# Altium PCB Linefollower_pcb.PcbDoc
Units mm, origin at the board's own origin, x right, y up, seen from the top; angles counter-clockwise.
Board outline 36.2 x 40 mm, 2 copper layers (Top Layer, Bottom Layer), stack 1.671 mm thick; 15 components, 20 nets, 60 pads, 0 vias.
Unrouted connection lines stored in the file: 6.
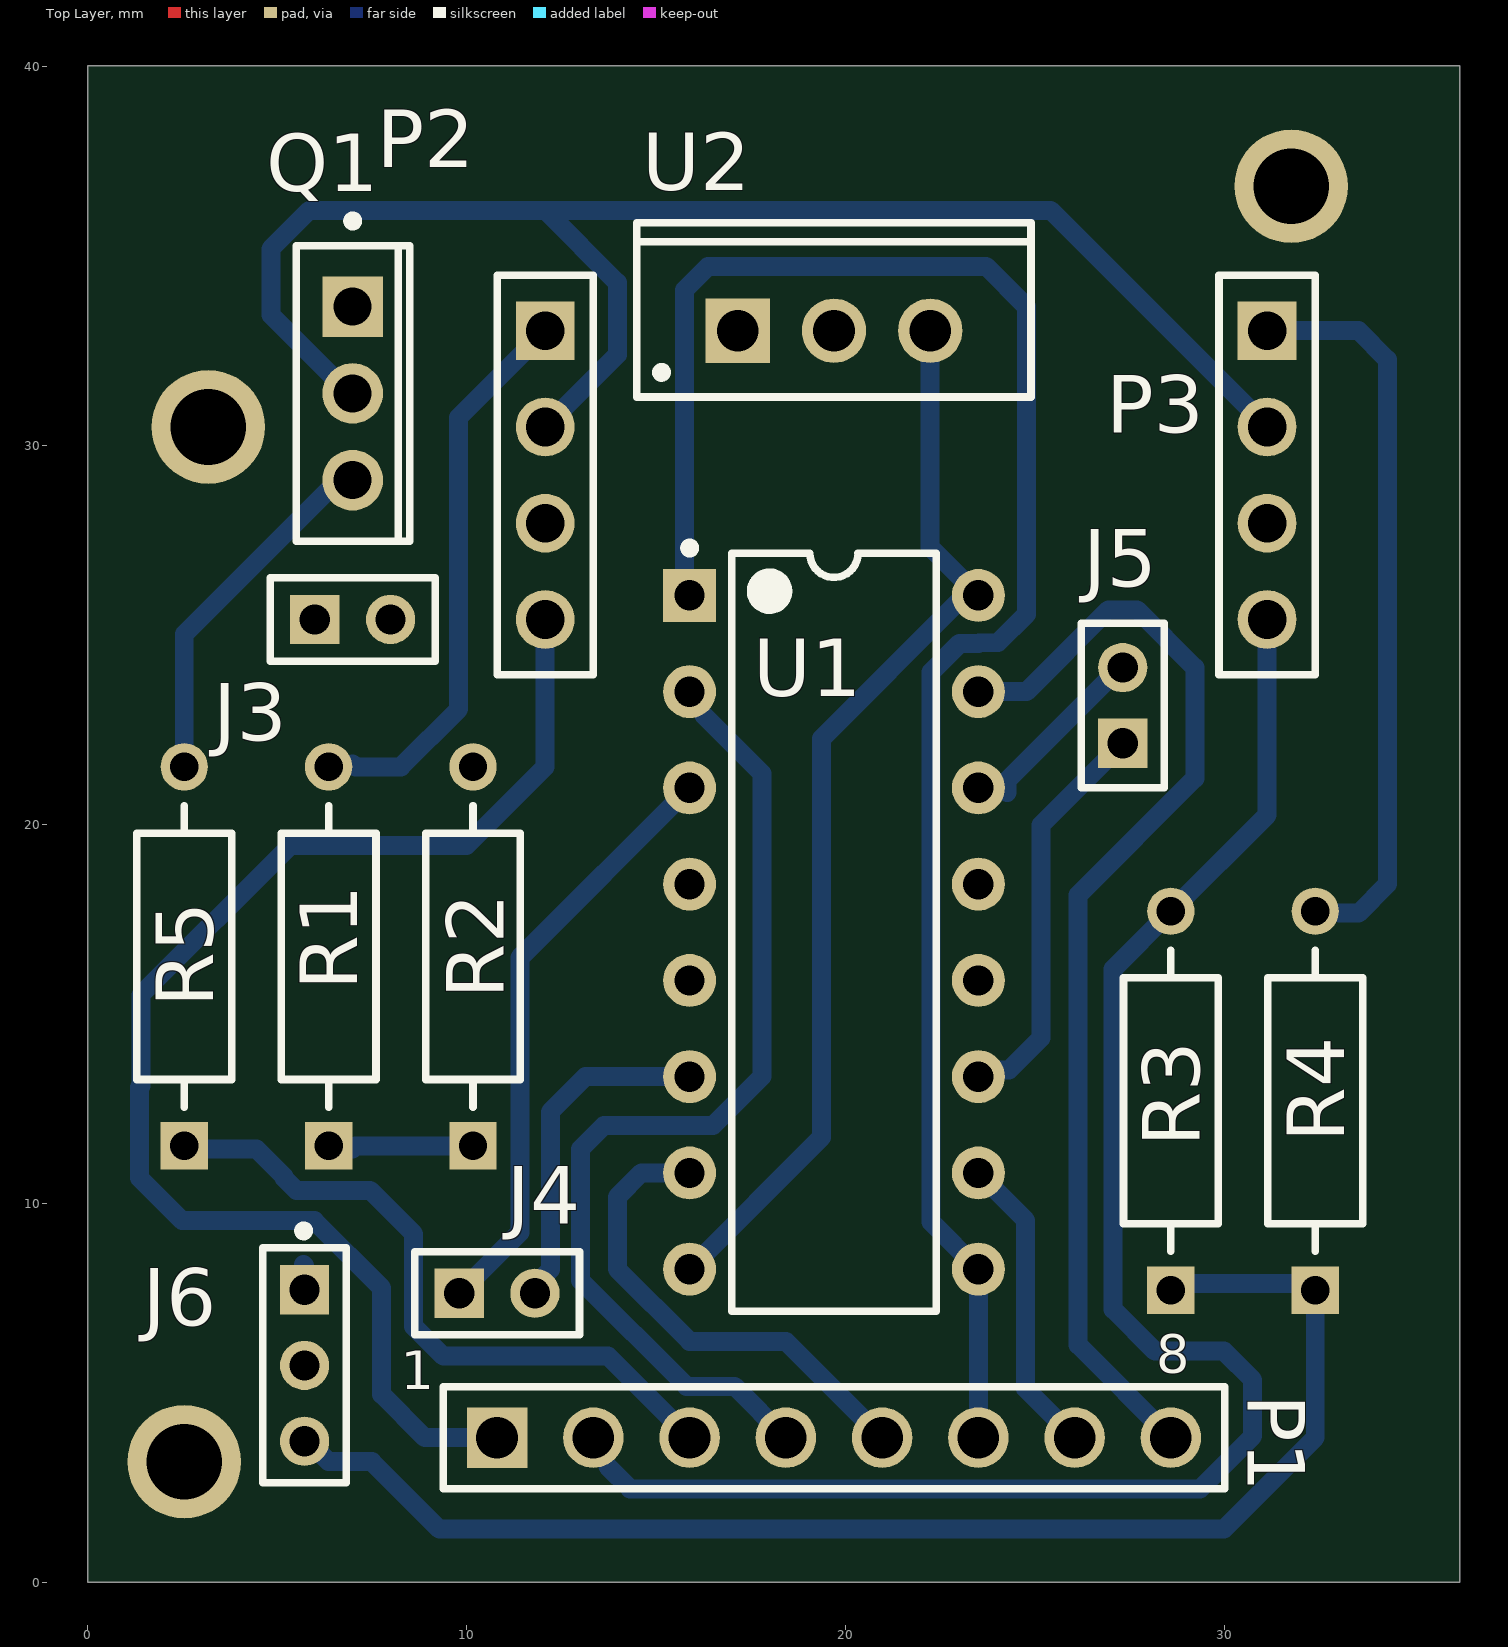
[diagram p0: Top Layer view]
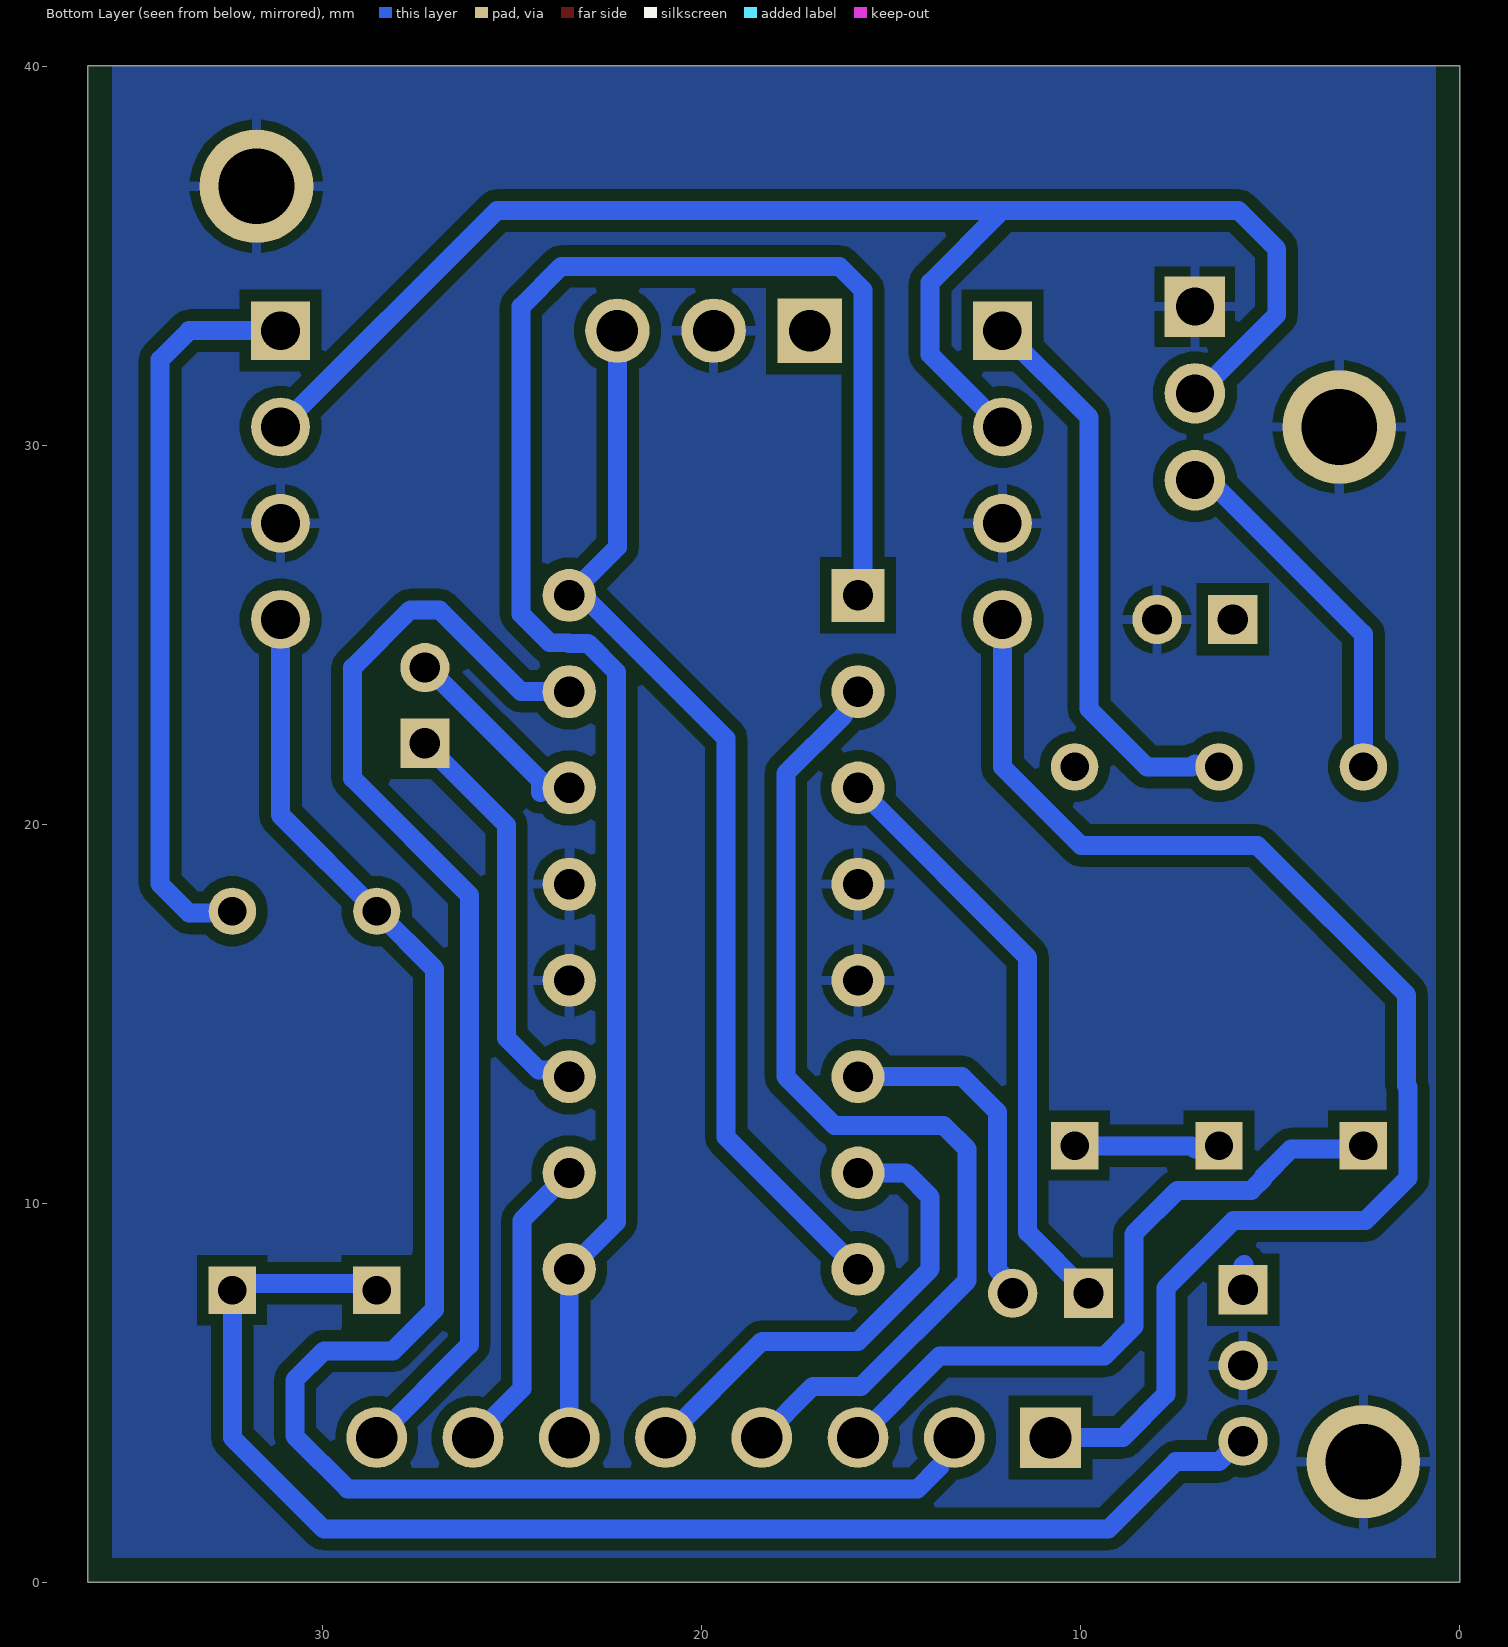
[diagram p1: Bottom Layer view, seen from below]
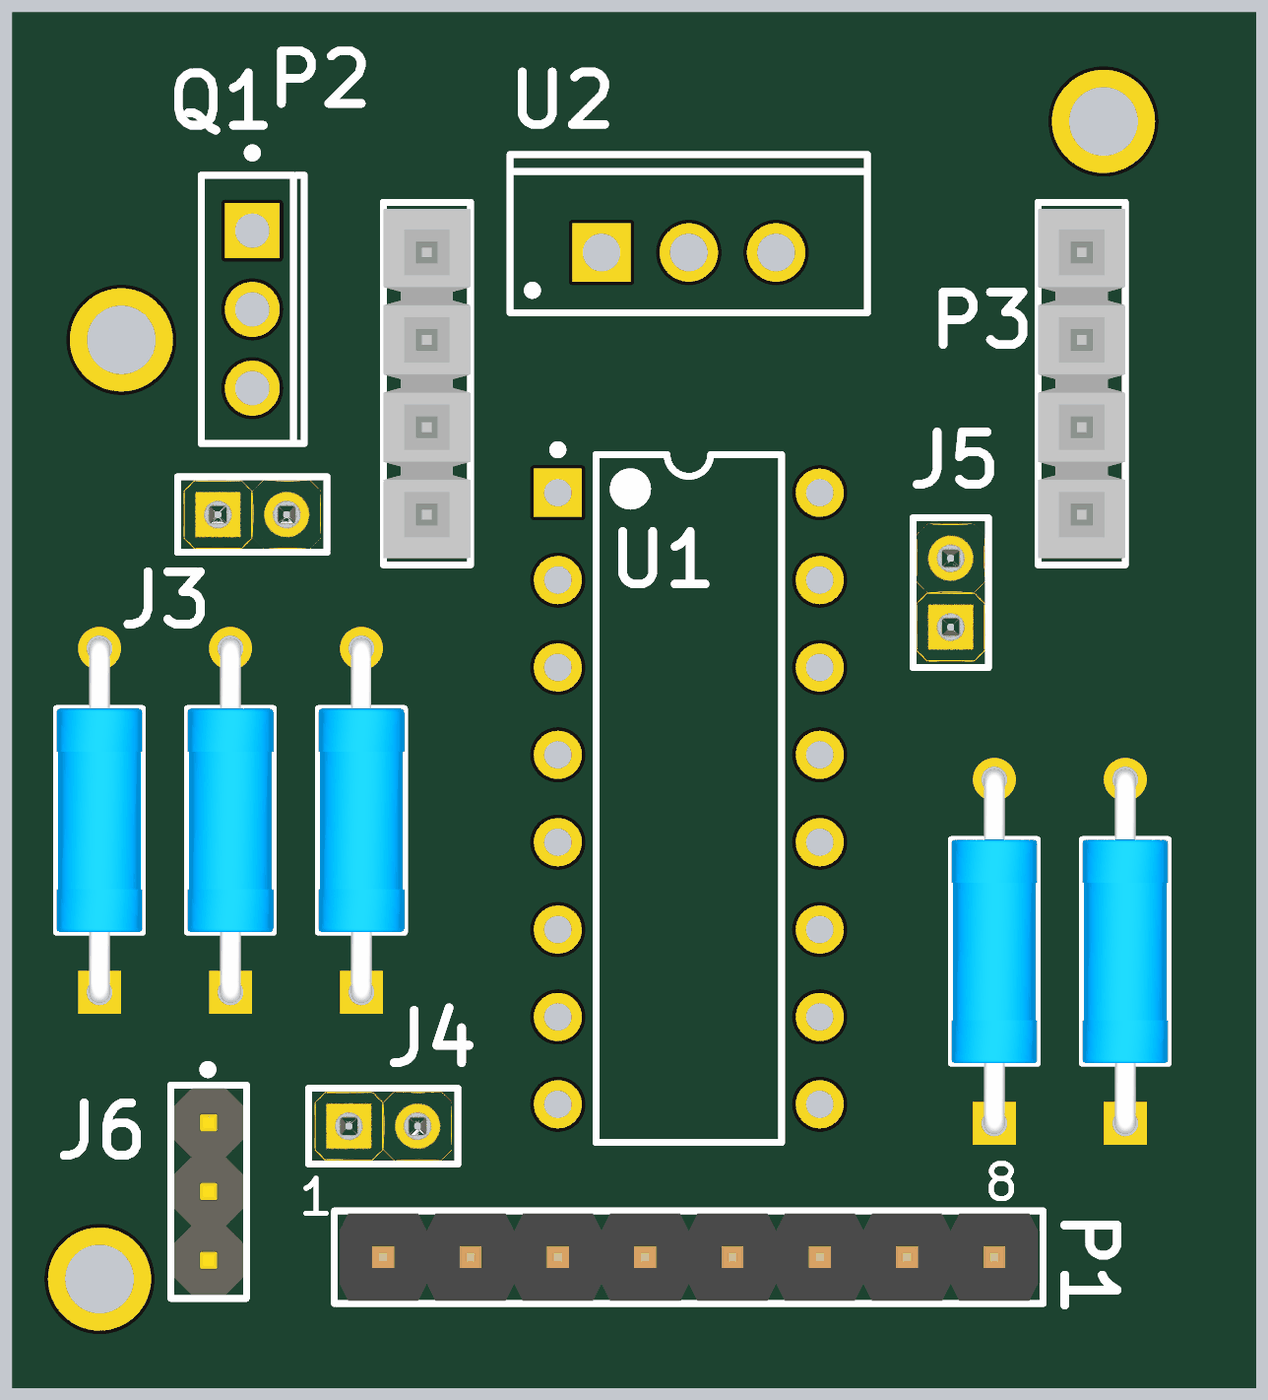
[diagram p2: 3D render of the assembled board from above, using the file's embedded part models]

## Layer stack, top to bottom
Top Solder: solder mask 0.0102, Solder Resist, Dk 3.5
Top Layer: signal copper 0.0356
Dielectric 1: dielectric 1.6, FR-4, Dk 4.8
Bottom Layer: signal copper 0.0356
Bottom Solder: solder mask 0.0102, Solder Resist, Dk 3.5

## Board outline
0,0 36.195,0 36.195,40.005 0,40.005

## Design rules (kind name [scope] priority, off if disabled: settings)
Clearance [All] p1: gap=0.1 ignorepadtopadclearanceinfootprint=TRUE
PolygonConnect [All] p1: connectstyle=Relief reliefconductorwidth=0.254 reliefentries=4 polygonreliefangle="90 Angle" airgapwidth=0.254
RoutingVias [All] p1: holewidth=0.711 width=1.27 viastyle="Through Hole" minholewidth=0.711 minwidth=1.27 maxholewidth=0.711 maxwidth=1.27
SolderMaskExpansion [All] p1: expansion=0.102 istentingtop=FALSE
Width [All] p1: maxlimit=1 minlimit=0.15 preferedwidth=0.5
30 further rules are at their usual default settings.

## Components (designator, comment, footprint, x,y, rotation, side; value= is the part's Value field where it differs from the comment)
J3 "battery supply" FP-M22-2510205-MFG 6.985,25.4 r0 top
J4 "LEFT MOTOR" FP-M22-2510205-MFG 10.795,7.62 r0 top
J5 "RIGHT MOTOR" FP-M22-2510205-MFG 27.305,23.13 r90 top
J6 "SUPPLY" FP-951103-8622-AR-MFG 5.715,5.715 r270 top
P1 "SIGNALS" 61300811121 19.685,3.81 r0 top
P2 "Left sensor" SMTC-TSW-104-08-X-S 12.065,33.02 r270 top
P3 "Right sensor" SMTC-TSW-104-08-X-S 31.115,33.02 r270 top
Q1 "BD135" ONSC-TO-225-3-77-09 6.985,31.365 r0 top
R1 "110R" FP-MRS25-MFG 6.35,16.51 r90 top value=1.1kΩ
R2 "5K1" FP-MRS25-MFG 10.16,16.51 r90 top value=1.1kΩ
R3 "5K1" FP-MRS25-MFG 28.575,12.7 r90 top value=1.1kΩ
R4 "110R" FP-MRS25-MFG 32.385,12.7 r90 top value=1.1kΩ
R5 "1K" FP-MRS25-MFG 2.54,16.51 r90 top value=1.1kΩ
U1 "L293D" STM-L293D-16 19.685,17.145 r0 top
U2 "L7805CV" TO220 19.685,33.02 r0 top

## Footprints (in the part's own frame and the unit in brackets; to place one, negate y for a bottom-side part, rotate by r counter-clockwise, add the part's x,y. Pads: shape width x height; smd on the part's side, far side on the other; paste and mask are expansions set on the pad)
61300811121 [mm] "Pin Header, pitch 2.54 mm, THT, Vertical, single row, 8p"
  rect 1.6x1.6 hole 1.1: 1(-8.89,0)
  round 1.6 hole 1.1: 2(-6.35,0) 3(-3.81,0) 4(-1.27,0) 5(1.27,0) 6(3.81,0) 7(6.35,0) 8(8.89,0)
  silkscreen extent -10.31,-1.35 10.31,1.35, body extent -10.16,-1.27 10.16,1.27, height 8.57
FP-951103-8622-AR-MFG [mm]
  rect 1.3x1.3 hole 0.8 paste-1000 mask+0: 1(-2,0)
  round 1.3 hole 0.8 paste-1000 mask+0: 2(0,0) 3(2,0)
  silkscreen extent -3.67,-1.1 3.1,1.1, body extent -3.2,-1.2 3.2,1.2, height 0.25
FP-M22-2510205-MFG [mm]
  rect 1.3x1.3 hole 0.8 paste-1000 mask+0: 1(-1,0)
  round 1.3 hole 0.8 paste-1000 mask+0: 2(1,0)
  silkscreen extent -2.17,-1.1 2.17,1.1, body extent -2.27,-1.2 2.27,1.2, height 0.25
FP-MRS25-MFG [mm]
  rect 1.25x1.25 hole 0.75 paste-1000 mask+0: 1(-5,0)
  round 1.25 hole 0.75 paste-1000 mask+0: 2(5,0)
  silkscreen extent -3.98,-1.25 3.98,1.25, body extent -5.72,-1.35 5.72,1.35, height 0.25
ONSC-TO-225-3-77-09 [mm] "FM, 3-Leads, Body 7.8x3mm, Pitch 2.29mm"
  rect 1.6x1.6 hole 1: 1(0,2.29)
  round 1.6 hole 1: 2(0,0) 3(0,-2.29)
  silkscreen extent -1.49,-3.9 1.51,4.67, body extent -1.49,-3.9 1.51,3.9, height 13.64
SMTC-TSW-104-08-X-S [mm] ".025 SQ Post Terminal Strip Assembly, 1x4 Pins, Vertical, 2.54mm Pitch, Male"
  rect 1.55x1.55 hole 1.02: 1(0,0)
  round 1.55 hole 1.02: 2(2.54,0) 3(5.08,0) 4(7.62,0)
  silkscreen extent -1.46,-1.27 9.08,1.27, body extent -1.27,-1.27 8.89,1.27, height 8.38
STM-L293D-16 [mm] "DIP, 16-Leads, Body 20x6.85mm, Pitch 2.54mm"
  rect 1.4x1.4 hole 0.8: 1(-3.81,8.89)
  round 1.4 hole 0.8: 2(-3.81,6.35) 3(-3.81,3.81) 4(-3.81,1.27) 5(-3.81,-1.27) 6(-3.81,-3.81) 7(-3.81,-6.35) 8(-3.81,-8.89) 9(3.81,-8.89) 10(3.81,-6.35) 11(3.81,-3.81) 12(3.81,-1.27) 13(3.81,1.27) 14(3.81,3.81) 15(3.81,6.35) 16(3.81,8.89)
  silkscreen extent -3.93,-10 2.7,10.26, body extent -3.93,-10 3.93,10, height 5.1
TO220 [mm] "TO, Thru-Hole, Vertical, Heatsink Mounted; 3 In-Line Leads; Pitch 2.54 mm"
  rect 1.7x1.7 hole 1.1: 1(-2.54,0)
  round 1.7 hole 1.1: 2(0,0) 3(2.54,0)
  silkscreen extent -5.2,-1.75 5.2,2.85, body extent -5.25,-1.8 5.25,2.9, height 19.7

## Part data
J3 J4 J5: library part CMP-15831-000005-1, "CONN HEADER VERT 2POS 2MM", Current Rating=2A, Manufacturer=Harwin, Manufacturer Part Number=M22-2510205, Package=0, Temperature="-40°C to +105°C", Temperature Range High=+105°C, Temperature Range Low=-40°C, Automotive=No, Category=Conn, ComponentLink2Description=Datasheet, ComponentLink2URL=https://cdn.harwin.com/pdfs/C018XX_M22_Series_Connectors.pdf, Conn Gender=Male, Conn Orientation=Vertical, Contact Material=Gold,Nickel, Device Class L1=Connectors, Device Class L2="Headers and Wire Housings", Device Class L3=unset, Digikey Description="CONN HEADER VERT 2POS 2MM", Footprint Url=https://cdn.harwin.com/pdfs/M22-251.pdf, Height=5.45mm, Lead Free=Yes, Mouser Description="Headers & Wire Housings 2 PIN SIL VERTICAL GOLD PIN HEADER", Number Of Contacts=2, Number Of Rows=1, Octopart=https://octopart.com/m22-2510205-harwin-2538221, Pitch=2mm, RoHS=TRUE
J6: library part CMP-05379-000003-1, "CONN HEADER VERT 3POS 2MM", Current Rating=2A, Manufacturer=3M, Manufacturer Part Number=951103-8622-AR, Temperature="-55°C to +125°C", Temperature Range High=+125°C, Temperature Range Low=-55°C, Automotive=No, Category=Conn, ComponentLink2Description=Datasheet, ComponentLink2URL=http://multimedia.3m.com/mws/media/1400506O/3m-pin-strip-header-951-series-78-5100-2653-3.pdf, Conn Gender=Male, Conn Orientation=Straight, Contact Material=Gold,Nickel, Device Class L1=Connectors, Device Class L2="Headers and Wire Housings", Device Class L3=unset, Digikey Description="CONN HEADER VERT 3POS 2MM", Height=6.3mm, Lead Free=Yes, Mouser Description="Header; PinStrip; CopperAlloy; HighTempThermoplastic; 3Cnts; 1A; RtAngle; 951Series", Number Of Contacts=3, Number Of Rows=1, Octopart=https://octopart.com/951103-8622-ar-3m-14400669, Package=951103-8622-AR, Pitch=2mm, RoHS=TRUE
P1: library part CMP-1502-01076-1, "THT Vertical Pin Header WR-PHD, Pitch 2.54 mm, Single Row, 8 pins", Contact Resistance=20mOhm, Manufacturer="Wurth Elektronik", Operating Temperature=-40to105degC, Package Reference=61300811121, Rated Current=3A, Withstanding Voltage=500VAC, Working Voltage=250VAC, Datasheet URL=https://katalog.we-online.de/em/datasheet/6130xx11121.pdf, Gender=Male, Manufacturer URL=http://www.we-online.de, Mounting Technology=THT, Orientation=Vertical, Packaging=Bag, Part Number=61300811121, Pin Number=8, Pitch=2.54mm, Publisher=WurthElektronik, Row Number=Single
P2 P3: library part CMP-1024-00358-1, "0.025\" SQ Post Header, Through-hole, Vertical, -55 to 125 degC, 2.54 mm Pitch, 4-Pin, Male, RoHS", Manufacturer=Samtec, PartNumber=TSW-104-08-L-S, Temperature Range="-55 to 125 degC", ComponentLink1Description="Manufacturer URL", ComponentLink1URL=http://www.samtec.com, ComponentLink2Description=Datasheet, ComponentLink2URL=http://www.samtec.com/documents/webfiles/pdf/TSW_TH.PDF, ComponentLink3Description="Package Specification", ComponentLink3URL=http://www.samtec.com/documents/webfiles/cpdf/TSW-XXX-XX-XXX-X-XX-XXX-MKT.pdf, DatasheetVersion=F-214, Mounting Technology=Through-hole, Orientation=Vertical, PackageDescription=".025[0.64] SQ. Post Terminal Strip Assembly", PackageReference=TSW-104-08-X-S, PackageVersion="DM, 8/1988", Pitch="2.54 mm", RoHS=True
Q1: library part CMP-1048-01272-1, "Plastic Medium-Power Silicon NPN Transistor, 3-Pin TO-225, Bulk Box", Manufacturer="On Semiconductor", ComponentLink1Description="Manufacturer URL", ComponentLink1URL=http://www.onsemi.com/, ComponentLink2Description=Datasheet, ComponentLink2URL=http://www.onsemi.com/pub_link/Collateral/BD135-D.PDF, ComponentLink3Description="Package Specification", ComponentLink3URL=http://www.onsemi.com/pub_link/Collateral/77-09.PDF, DatasheetVersion="Rev. 16", IC Continuous (A)=1.5, Mounting Technology="Through Hole", PackageDescription="3-Pin Flange Mount, Vertical Straight Lead, Body 7.6 x 2.7 mm, Pitch 2.29 mm", PackageReference=TO-225-3-77-09, PackageVersion="Rev. AC, 12/2013", Packing="Bulk Box", PartNumber=BD135, Polarity=NPN, RoHS=FALSE
R1 R2 R3 R4 R5: library part CMP-02408-000003-1, "RES 1.1K OHM 0.6W 1% AXIAL", Manufacturer="Vishay BC Components", Manufacturer Part Number=MRS25000C1101FCT00, Package=MRS25, Power Rating=0.6W, Resistance=1.1kΩ, Temperature="-55°C to +155°C", Temperature Coefficient=50ppm/°C, Temperature Range High=+155°C, Temperature Range Low=-55°C, Tolerance=1%, Voltage Rating=350V, Automotive=No, Category=Res, ComponentLink2Description=Datasheet, ComponentLink2URL=http://www.vishay.com/docs/28724/mrs16m25.pdf, Composition="Thin Film", Device Class L1="Passive Components", Device Class L2=Resistors, Device Class L3="Through-Hole Resistors", Digikey Description="RES 1.1K OHM 0.6W 1% AXIAL", Height=2.5mm, Ipc Land Pattern Name=RESAD1000W75L650D250, Lead Free=Yes, Mouser Description="Thin Film Resistors .6watt 1.1Kohms 1%", Octopart=https://octopart.com/mrs25000c1101fct00-vishay-43740214, RoHS=TRUE, Series=MRS25
U1: library part CMP-2000-06524-1, "Push-Pull Four Channel Driver with Diode, 4.5 to 36 V, -40 to 150 degC, 16-Pin PDIP, RoHS, Tube", Current - Output / Channel=600mA, Current - Peak Output=1.2A, Manufacturer=STMicroelectronics, On-State Resistance=-, Operating Temperature=-40°C~150°C, Package / Case="16-DIP(0.300\",7.62mm)", Package Description="16-Pin Thru-Hole Dual-In-Line, Body 20 x 6.85 mm, Pitch 2.54 mm", Package Reference=DIP-16, Standard Package=25, Supplier Device Package=16-PowerDIP, Voltage - Supply=4.5V~36V, Category=IntegratedCircuits(ICs), Datasheet URL=http://www.st.com/st-web-ui/static/active/en/resource/technical/document/datasheet/CD00000059.pdf, Datasheet Version=07/2003, Dynamic Catalog=HalfBridge, Family=PMIC-MOSFET,BridgeDrivers-InternalSwitch, Input Type=Non-Inverting, Manufacturer URL=http://www.st.com/, Mounting Technology=ThroughHole, Mounting Type=ThroughHole, Number of Outputs=4, Other Names=497-2936-5, Other Related Documents=L293DViewAllSpecifications, Packaging=Tube, PartNumber=L293D, Series=-, Type=HalfBridge
U2: library part CMP-0244-00483-1, "Positive Voltage Regulator, 5V, 3-Pin TO-220", ComponentLink1Description="Manufacturer URL", ComponentLink1URL=http://www.st.com, ComponentLink2Description=Datasheet, ComponentLink2URL=http://www.st.com/internet/com/TECHNICAL_RESOURCES/TECHNICAL_LITERATURE/DATASHEET/CD00000444.pdf, ComponentLink3Description="Package Specification", ComponentLink3URL=http://www.st.com/internet/com/TECHNICAL_RESOURCES/TECHNICAL_LITERATURE/PACKAGE_INFORMATION/CD00004649.pdf, DatasheetVersion=16/11/2011, PackageDescription="TO, Thru-Hole, Vertical, Heatsink Mounted; 3 In-Line Leads; Pitch 2.54 mm", PackageReference=TO220, PackageVersion=ver3.0

## Free pads (board coordinates)
  round 3 hole 2: 2(2.54,3.175) 3(3.175,30.48) 4(31.75,36.83)

## Nets (pads, with @x,y where several pads share a name; then routed paths per layer and width w, separated by ;. In a path a pad name is that pad's centre, name@x,y a point inside that pad or via, vN(x,y) a via of type N, cw(c..) or ccw(c..) an arc to the next point about the centre after c; other vN are vias at no path point)
+3V3: J6.3 R1.1 R2.1 R3.1 R4.1 | length 39.7
  Bottom Layer w0.5: J6.3 5.81,3.715 6.35,3.175 7.493,3.175 9.271,1.397 29.972,1.397 32.385,3.81 R4.1 32.211,7.874 28.749,7.874 R3.1 ; 6.985,11.43 7.065,11.51 R2.1
D1_R(A): J3.2 J6.2 P2.3 P3.3 pad.2 pad.3 pad.4 Q1.1 U1.4 U1.5 U1.12 U1.13 U2.2
D1_R(K): P1.1 P2.4 R2.2 | length 35.8
  Bottom Layer w0.5: P1.1 8.89,3.81 7.749,4.951 7.749,7.759 5.973,9.535 2.487,9.535 1.365,10.657 1.365,13.06 1.397,13.092 1.397,15.494 5.334,19.431 9.986,19.431 12.065,21.51 P2.4
D1_T(A): P2.1 R1.2 | length 14.4
  Bottom Layer w0.5: 6.985,21.59 7.065,21.51 8.255,21.51 9.779,23.034 9.779,30.734 P2.1
D1_T(K): P2.2 P3.2 Q1.2 | length 41.2
  Bottom Layer w0.5: Q1.2@6.897,31.75 Q1.2@6.985,31.75 ; Q1.2 6.897,31.365 4.826,33.436 4.826,35.179 5.842,36.195 12.065,36.195 ; P2.2 13.97,32.385 13.97,34.29 12.065,36.195 ; P3.2 25.4,36.195 12.065,36.195
D2_R(K): P1.2 P3.4 R3.2 | length 43.7
  Bottom Layer w0.5: 13.716,3.048 14.304,2.46 29.345,2.46 30.734,3.849 30.734,5.334 29.972,6.096 28.151,6.096 27.051,7.196 27.051,16.176 R3.2 31.115,20.24 P3.4
D2_T(A): P3.1 R4.2 | length 18.9
  Bottom Layer w0.5: P3.1 33.528,33.02 34.29,32.258 34.29,18.415 33.528,17.653 33.02,17.653
NetJ4_1: J4.1 U1.3 | length 15.9
  Bottom Layer w0.5: J4.1 11.4,9.225 11.4,16.48 U1.3
NetJ4_2: J4.2 U1.6 | length 9.2
  Bottom Layer w0.5: J4.2@11.948,7.773 J4.2 11.795,7.836 12.2,8.241 12.2,12.407 13.128,13.335 U1.6
NetJ5_1: J5.1 U1.11 | length 10.7
  Bottom Layer w0.5: U1.11 23.667,13.507 24.302,13.507 25.146,14.351 25.146,19.971 J5.1
NetJ5_2: J5.2 U1.14 | length 4.6
  Bottom Layer w0.5: 24.257,20.828 24.257,21.16 27.227,24.13 J5.2
NetP1_3: P1.3 R5.1 | length 17.3
  Bottom Layer w0.5: 3.175,11.43 4.445,11.43 5.175,10.7 5.175,10.657 5.497,10.335 7.445,10.335 8.595,9.185 8.595,6.742 9.378,5.959 13.726,5.959 P1.3
NetP1_4: P1.4 U1.2 | length 26.3
  Bottom Layer w0.5: 16.256,22.86 17.78,21.336 17.78,13.335 16.49,12.045 13.615,12.045 13,11.43 13,7.955 15.795,5.16 17.065,5.16 P1.4
NetP1_5: P1.5 U1.7 | length 13.2
  Bottom Layer w0.5: U1.7 14.605,10.795 13.97,10.16 13.97,8.255 15.875,6.35 18.415,6.35 P1.5 P1.5@20.657,3.81
NetP1_6: P1.6 U1.1 U1.9 | length 49.8
  Bottom Layer w0.5: U1.1 15.745,26.165 15.745,34.098 16.365,34.718 23.702,34.718 24.765,33.655 24.765,25.537 24.013,24.785 23.515,24.785 23.495,24.765 22.997,24.765 22.245,24.013 22.245,9.505 U1.9 P1.6
NetP1_7: P1.7 U1.10 | length 8.4
  Bottom Layer w0.5: U1.10@23.739,10.795 U1.10 24.745,9.545 24.745,5.1 P1.7 P1.7@26.035,3.97
NetP1_8: P1.8 U1.15 | length 29.8
  Bottom Layer w0.5: U1.15 24.765,23.495 26.924,25.654 27.686,25.654 29.21,24.13 29.21,21.209 26.13,18.129 26.13,6.255 P1.8
NetQ1_3: Q1.3 R5.2 | length 9.8
  Bottom Layer w0.5: R5.2 2.54,25.015 Q1.3@6.985,29.46
NetU1_8: U1.8 U1.16 U2.3 | length 28.7
  Bottom Layer w0.5: U1.8 19.357,11.737 19.357,22.256 22.964,25.863 23.323,25.863 U1.16 22.225,27.305 U2.3
VIN: J3.1 J6.1 U2.1 | length 0
  Bottom Layer w0.5: 5.683,8.382 J6.1@5.715,8.35

## Polygon pours and split planes (outlines as drawn)
D1_R(A) on Bottom Layer "D1_R(A)_L02_P000" (solid, pour order 0): 0.635,0.635 35.56,0.635 35.56,40.005 21.59,40.005 0.635,40.005

## Silkscreen, mask and mechanical layers (free items; w line width, h text height)
Bottom Assembly:
  the board outline again, w0.254

## Text inside footprints (layer, text, board x,y; h text height)
P1: Top Overlay "1" at 8.255,5.08 h1.02; Top Overlay "8" at 28.195,5.51 h1.02